# Altium PCB Motor_Driver_2018PCB.PcbDoc
Units mm, origin at the board's own origin, x right, y up, seen from the top; angles counter-clockwise.
Board outline 27.18 x 14.22 mm, 2 copper layers (Top Layer, Bottom Layer); 10 components, 10 nets, 50 pads, 19 vias.
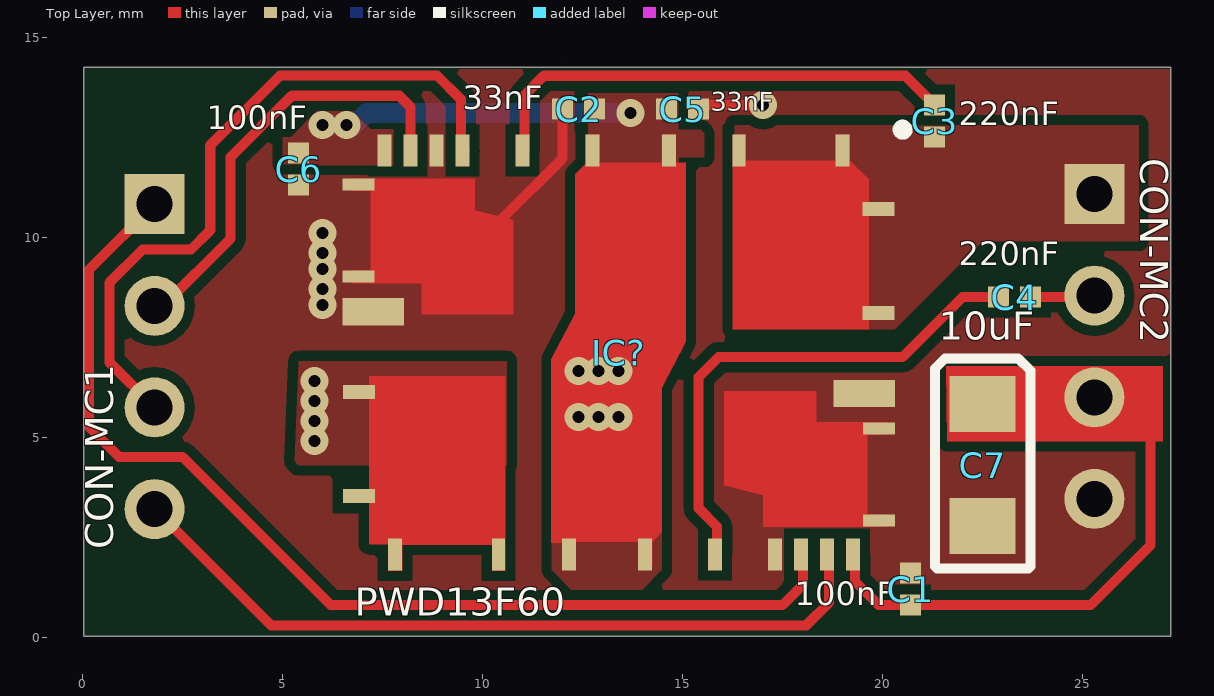
[diagram p0: Top Layer view]
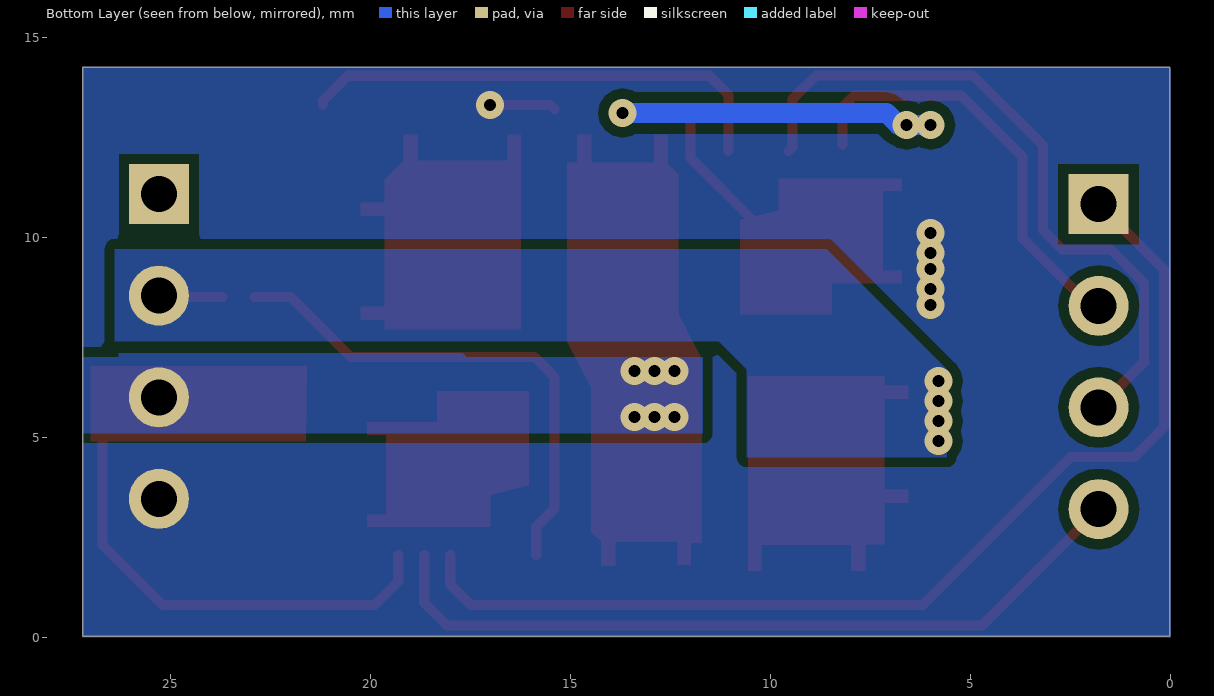
[diagram p1: Bottom Layer view, seen from below]

## Layer stack, top to bottom
Top Solder: solder mask 0.0102, Solder Resist, Dk 3.5
Top Layer: signal copper 0.0356
Dielectric 1: dielectric 0.32, FR-4, Dk 4.8
Bottom Layer: signal copper 0.0356
Bottom Solder: solder mask 0.0102, Solder Resist, Dk 3.5

## Board outline
0.022,0.025 27.2,0.025 27.2,14.249 0.022,14.249

## Design rules (kind name [scope] priority, off if disabled: settings)
Clearance "HV Clearence" [InNetClass('HV')] p1: gap=0.254 ignorepadtopadclearanceinfootprint=TRUE except(0.5: Track-Poly SMDPad-Poly THPad-Poly Via-Poly)
Clearance [All] p2: gap=0.254 ignorepadtopadclearanceinfootprint=TRUE except(0: Arc-Hole Track-Hole SMDPad-Hole THPad-Hole Via-Hole Fill-Hole Poly-Hole Region-Hole Text-Hole)
PlaneClearance [All] p1: clearance=0.5
PlaneConnect [All] p1: planeconnectstyle=Direct reliefexpansion=0.508 reliefentries=4 reliefconductorwidth=0.254 reliefairgap=0.254
PolygonConnect [All] p1: connectstyle=Direct reliefconductorwidth=0.254 reliefentries=4 polygonreliefangle="90 Angle" airgapwidth=0.254
RoutingVias [All] p1: holewidth=0.711 width=1.27 viastyle="Through Hole" minholewidth=0.711 minwidth=1.27 maxholewidth=0.711 maxwidth=1.27
SolderMaskExpansion [All] p1: expansion=0.102
Width [All] p1: maxlimit=1 minlimit=0.254 preferedwidth=0.254
28 further rules are at their usual default settings.

## Components (designator, comment, footprint, x,y, rotation, side; value= is the part's Value field where it differs from the comment)
C1 "100nF" 0402-CAP 20.7,1.2 r90 top value=100n
C2 "33nF" 0402-CAP 12.4,13.2 r180 top value=33n
C3 "220nF" 0402-CAP 21.3,12.9 r90 top value=220n
C4 "220nF" 0402-CAP 23.3,8.5 r0 top value=220n
C5 "33nF" 0402-CAP 15,13.2 r0 top value=33n
C6 "100nF" 0402-CAP 5.4,11.7 r270 top value=100n
C7 "10uF" 1206_CAP_TANT 22.5,4.3 r270 top
CON-MC1 "22032041" 04X01_CONECTOR_MALE 1.8,7.01 r90 top
CON-MC2 "22032041" 04X01_CONECTOR_MALE 25.295,7.264 r90 top
IC? "PWD13F60" QFN50P1000X1300X85_HS-61N 12.45,7.11 r270 top

## Footprints (in the part's own frame and the unit in brackets; to place one, negate y for a bottom-side part, rotate by r counter-clockwise, add the part's x,y. Pads: shape width x height; smd on the part's side, far side on the other; paste and mask are expansions set on the pad)
04X01_CONECTOR_MALE [mm] "0022032041"
  rect 1.5x1.5 hole 0.9: 1(3.81,0)
  round 1.5 hole 0.9: 2(1.27,0) 3(-1.27,0) 4(-3.81,0)
  body extent -4.95,-1.18 4.95,1.18, height 3.38
0402-CAP [mm] "Chip Capacitor, Body 1.0x0.5mm, Height 0.6mm, IPC Medium Density"
  rect 0.52x0.52 smd: 1(-0.4,0) 2(0.4,0)
  body extent -0.55,-0.3 0.55,0.3, height 0.33
1206_CAP_TANT [mm]
  rect 1.4x1.65 smd: 1(-1.525,0) 2(1.525,0)
  silkscreen extent -2.67,-1.19 2.59,1.19, body extent -1.7,-0.9 1.7,0.9, height 1.7
QFN50P1000X1300X85_HS-61N [mm] "QFN, 60-Leads, Body 10,00x13,00mm, Pitch 0,50mm/0,65mm, Thermal Pad 8,60x12,00mm, IPC Medium Density"
  rect 0.8x0.35 smd: 1(-5.05,6.55) 3(-5.05,2.205) 4(-5.05,0.3) 5(-5.05,-1.45) 6(-5.05,-2.95) 7(-5.05,-3.6) 8(-5.05,-4.25) 9(-5.05,-4.9) 15(5.05,-4.64) 17(5.05,-0.295) 18(5.05,1.61) 19(5.05,3.36) 20(5.05,4.86) 21(5.05,5.51) 22(5.05,6.16) 23(5.05,6.81)
  rect 0.8x0.325 smd: 2(-5.05,3.962) 16(5.05,-2.052)
  rect 0.3x0.8 smd: 10(-4.2,-5.55) 11(-1.9,-5.55) 24(4.2,7.46) 25(1.9,7.46)
  rect 0.68x1.54 smd: 12(-1.02,-5.18) 26(1.02,7.09)
  rect 0.35x0.8 smd: 13(0.99,-5.54) 14(3.59,-5.54) 27(-0.99,7.45) 28(-3.59,7.45)
  Top Layer pour cut-out: -3.325,-2.038
  Top Layer region: -5.45,0.125 -4.725,0.125 -4.46,-0.14 -0.975,-0.14 0.165,-0.73 4.75,-0.73 4.75,-0.45 5.3,-0.45 5.3,-0.13 4.725,-0.13 4.725,1.44 5.325,1.44 5.325,1.79 4.725,1.79 4.485,2.03 0.875,2.03 -0.275,2.63 -4.75,2.63 -4.75,2.38 -5.45,2.38 -5.45,2.05 -5.43,2.03 -4.75,2.03 -4.75,0.46 -5.45,0.46
  Top Layer region: -5.45,3.8 -0.59,3.8 -0.59,7.2 -0.825,7.2 -0.825,7.8 -1.15,7.8 -1.15,7.2 -3.425,7.2 -3.425,7.8 -3.75,7.8 -3.75,7.2 -4.34,7.2 -4.8,6.725 -5.45,6.725 -5.45,6.375 -4.8,6.375 -4.8,4.125 -5.45,4.125
  Top Layer region: -5.3,3.3
  Top Layer region: -4.35,-5.725 -4.35,-2.65 -3.56,-2.65 -3.32,-1.685 -0.965,-1.685 -0.965,-3.975 -1.735,-3.975 -1.735,-5.725 -2.05,-5.725 -2.05,-5.25 -4.05,-5.25 -4.05,-5.725
  Top Layer region: 4.35,7.635 4.35,4.56 3.56,4.56 3.32,3.595 0.965,3.595 0.965,5.885 1.735,5.885 1.735,7.635 2.05,7.635 2.05,7.16 4.05,7.16 4.05,7.635
  Top Layer region: 5.3,-1.39
  Top Layer region: 5.45,-1.89 0.59,-1.89 0.59,-5.29 0.825,-5.29 0.825,-5.89 1.15,-5.89 1.15,-5.29 3.425,-5.29 3.425,-5.89 3.75,-5.89 3.75,-5.29 4.791,-5.29 4.791,-4.815 5.45,-4.815 5.45,-4.465 4.8,-4.465 4.8,-2.215 5.45,-2.215
  Top Layer pour cut-out: 3.325,3.948
  Top Layer keep-out region: -7.3,-0.475
  Top Layer keep-out region: -3.325,-2.4
  Top Layer keep-out region: -3.05,-5.4
  Top Layer keep-out region: -2.725,-4.6
  Top Layer keep-out region: 2.725,6.51
  Top Layer keep-out region: 3.05,7.31
  Top Layer keep-out region: 3.325,4.31
  silkscreen extent -5.7,7.93 -5.45,8.17, body extent -5.05,-5.55 5.05,7.55, height 0.85

## Part data
C1 C6: library part CC0402-100nF-50v-A.3, "CAP CER 0.1UF 50V 10% X7R 0402", Part No=C1005X7R1H104K050BB, Cod EMS=05.281.019.021
C2 C5: library part CC0402-33nF-5, "CAP CER 0.033UF 25V 10% X7R 0402", Part No=GRM155R71E333KA88J, Cod EMS=05.281.019.505
C3 C4: library part CC0402-220nF-5, "CAP CER 0.22UF 16V 10% X7R 0402", Part No=GRM155R71C224KA12D, Cod EMS=05.281.019.502
C7: library part CT3216-10uF-1, "CAP TANT 10uF 10% 16V CASE A ESR = 3 Ohm @ 100 kHz", Manufacturer="AVX Corporation", Part No=TAJA106K016RNJ, Cod EMS=05.281.019.213
CON-MC1 CON-MC2: library part 04x01_Conector_Male-SCH, "CONN HEADER 4POS .100 VERT TIN"
IC?: library part PWD13F60_1-01.A.8, "High Voltage Full Bridge"

## Via types
v1: diameter 0.7, hole 0.3, Top Layer to Bottom Layer, tented both sides, 19 vias

## Nets (pads, with @x,y where several pads share a name; then routed paths per layer and width w, separated by ;. In a path a pad name is that pad's centre, name@x,y a point inside that pad or via, vN(x,y) a via of type N, cw(c..) or ccw(c..) an arc to the next point about the centre after c; other vN are vias at no path point)
GND: C1.2 C2.2 C5.2 C6.2 C7.2 CON-MC2.4 IC?.7 IC?.10 IC?.11 IC?.12 IC?.20 IC?.24 IC?.25 IC?.26 | length 5.1
  Top Layer w0.254: 10.452,10.425 12,11.973 C2.2 ; C5.2 15.5,13.3 v1(17.014,13.3)
  other v1: 6,8.3 6,8.7 6,9.2 6,9.6 6,10.1
MA: C4.2 CON-MC2.2 IC?.13 IC?.14 IC?.15 IC?.16 | length 1.6
  Top Layer w0.254: C4.2 25.261,8.5 CON-MC2.2
  other v1: 5.8,4.9 5.8,5.4 5.8,5.9 5.8,6.4
MAH: CON-MC1.4 IC?.22 | length 19.5
  Top Layer w0.254: CON-MC1.4 4.708,0.292 18.092,0.292 18.66,0.86 IC?.22@18.66,2.05
MAL: CON-MC1.3 IC?.6 | length 17.3
  Top Layer w0.254: CON-MC1.3 0.669,6.871 0.669,8.858 1.5,9.689 2.708,9.689 3.192,10.173 3.192,12.292 4.939,14.039 8.861,14.039 9.456,13.444 9.456,12.244 IC?.6@9.55,12.15
MB: C3.1 CON-MC2.1 IC?.1 IC?.2 IC?.27 IC?.28
MBH: CON-MC1.2 IC?.8 | length 10.8
  Top Layer w0.254: CON-MC1.2 2.017,8.28 3.7,9.963 3.7,12 5.231,13.531 7.914,13.531 8.2,13.245 8.2,12.324 IC?.8@8.204,12.32
MBL: CON-MC1.1 IC?.21 | length 26.9
  Top Layer w0.254: CON-MC1.1 0.161,9.181 0.161,5.252 0.913,4.5 2.5,4.5 6.2,0.8 17.5,0.8 18.01,1.31 IC?.21@18.01,2.05
NetC3_2: C3.2 IC?.5 | length 12.1
  Top Layer w0.254: IC?.5@11.05,12.15 11.05,13.55 11.531,14.031 20.569,14.031 21.192,13.408 C3.2@21.192,13.3
NetC4_1: C4.1 IC?.19 | length 13
  Top Layer w0.254: IC?.19@15.86,2.05 15.86,2.76 15.4,3.22 15.4,6.5 15.9,7 20.5,7 22,8.5 C4.1
VCC: C1.1 C2.1 C5.1 C6.1 C7.1 CON-MC2.3 IC?.3 IC?.4 IC?.9 IC?.17 IC?.18 IC?.23 | length 19.7
  Top Layer w0.254: IC?.23@19.31,2.05 19.31,1.39 19.9,0.8 C1.1 25.2,0.8 26.7,2.3 26.7,5.3
  Bottom Layer w0.5: v1(6,12.8) v1(6.6,12.8) 6.8,12.8 7.1,13.1 v1(13.7,13.1)
  other v1: 12.4,5.5 12.9,5.5 13.4,5.5 12.4,6.65 12.9,6.65 13.4,6.65

## Polygon pours and split planes (outlines as drawn)
GND on Top Layer "GND_L01_P088" (solid, remove dead copper, pour order 88): 26.1,4.3 21.7,4.3 21.7,3.3 20.3,1.9 20.3,1.3 24.6,1.3 26.1,2.8
VCC on Top Layer "VCC_L01_P086" (solid, remove dead copper, pour order 86): 26.819,7 21.335,7 21.335,4.9 26.819,4.9
GND on Top Layer "GND" (solid, remove dead copper, pour order 82): 0,14.2 27.2,14.2 27.2,0 0,0
GND on Top Layer "GND" (solid, remove dead copper, pour order 81): 5.6,11.7 5.6,8 7.8,8 7.8,11.7
GND on Top Layer "GND_L01_P079" (solid, remove dead copper, pour order 79): 5.1,11.4 9.8,11.4 9.8,7.7 5.1,7.7
GND on Top Layer "GND_L01_P080" (solid, remove dead copper, pour order 80): 20.4,5.3 20.4,6.4 16.1,6.4 16.1,5.3
MB on Top Layer "MB_L01_P078" (solid, remove dead copper, pour order 78): 16.3,12.8 26.4,12.8 26.4,9.9 22.5,9.9 20.3,7.7 16.3,7.7
MA on Top Layer "MA_L01_P077" (solid, remove dead copper, pour order 77): 5.4,6.9 10.6,6.9 10.6,4.3 5.296,4.3
VCC on Top Layer "VCC_L01_P075" (solid, remove dead copper, pour order 75): 12.639,13.6 12.639,11.85 12.664,11.825 12.689,11.85 14.9,11.85 14.9,13.6
VCC on Top Layer "VCC_L01_P069" (solid, remove dead copper, pour order 69): 7.8,11.8 7.8,12.7 7.2,12.7 6.7,13.2 5.9,13.2 5.2,12.5 5,12.5 5,11.8
VCC on Top Layer "Vs" (solid, remove dead copper, pour order 68): 13.025,12 15.541,12 15.541,12.759 14.9,13.4 13.7,13.4 13.025,12.725
VCC on Top Layer "Vs" (solid, remove dead copper, pour order 67): 14.484,2.874 11.724,2.874 11.724,1.676 12.3,1.1 13.9,1.1 14.484,1.684
GND on Bottom Layer "GND" (solid, remove dead copper, pour order 84): 0,0 27.2,0 27.2,14.2 0,14.2
GND on Bottom Layer "GND" (solid, remove dead copper, pour order 83): 27.2,14.249 0.022,14.249 0.022,0.025 27.2,0.025 27.2,1.5
VCC on Bottom Layer "VCC" (solid, remove dead copper, pour order 76): 27.2,5.1 11.7,5.1 11.7,7 27.2,7
MA on Bottom Layer "MA_L02_P074" (solid, remove dead copper, pour order 74): 26.4,9.7 8.6,9.7 5.6,6.7 5.6,4.5 10.6,4.5 10.6,6.7 11.3,7.4 26.4,7.4
VCC on Bottom Layer "VCC" (solid, remove dead copper, pour order 70): 17.7,7.1 15.746,5.146 26.3,5.146 26.3,7.1

## Other copper
Top Layer:
  region net VCC: 21.594,6.775 27,6.775 27,4.896 21.617,4.896

## Silkscreen, mask and mechanical layers (free items; w line width, h text height)
Mechanical 1:
  the board outline again, w0.3